# EAGLE board Arch GPRS (EAGLE 6.4), part 1 of 2
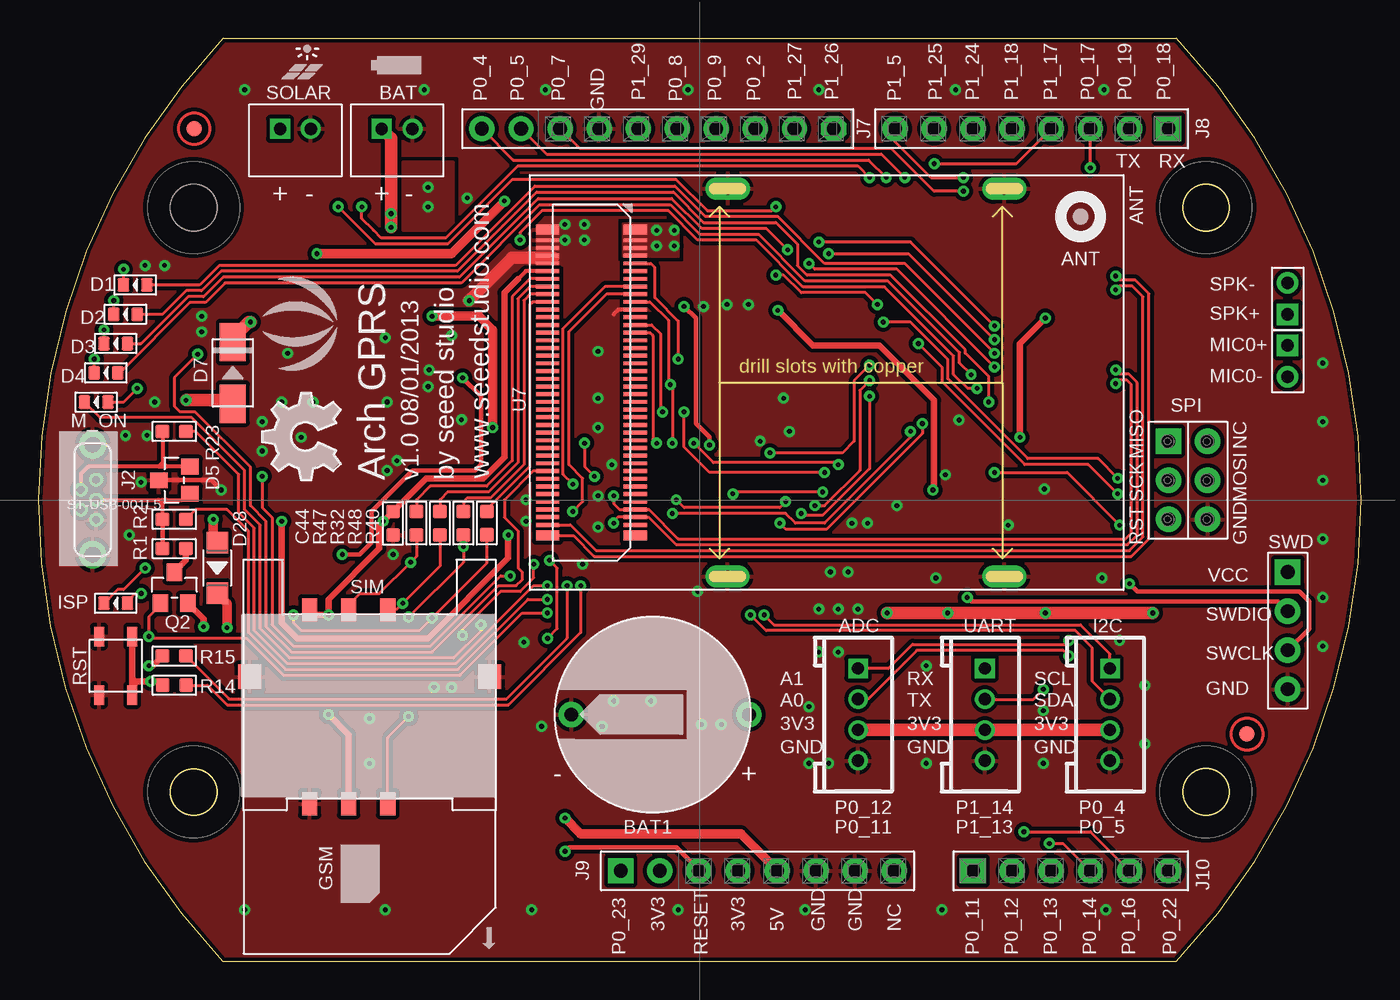
[diagram p0: board, top side]
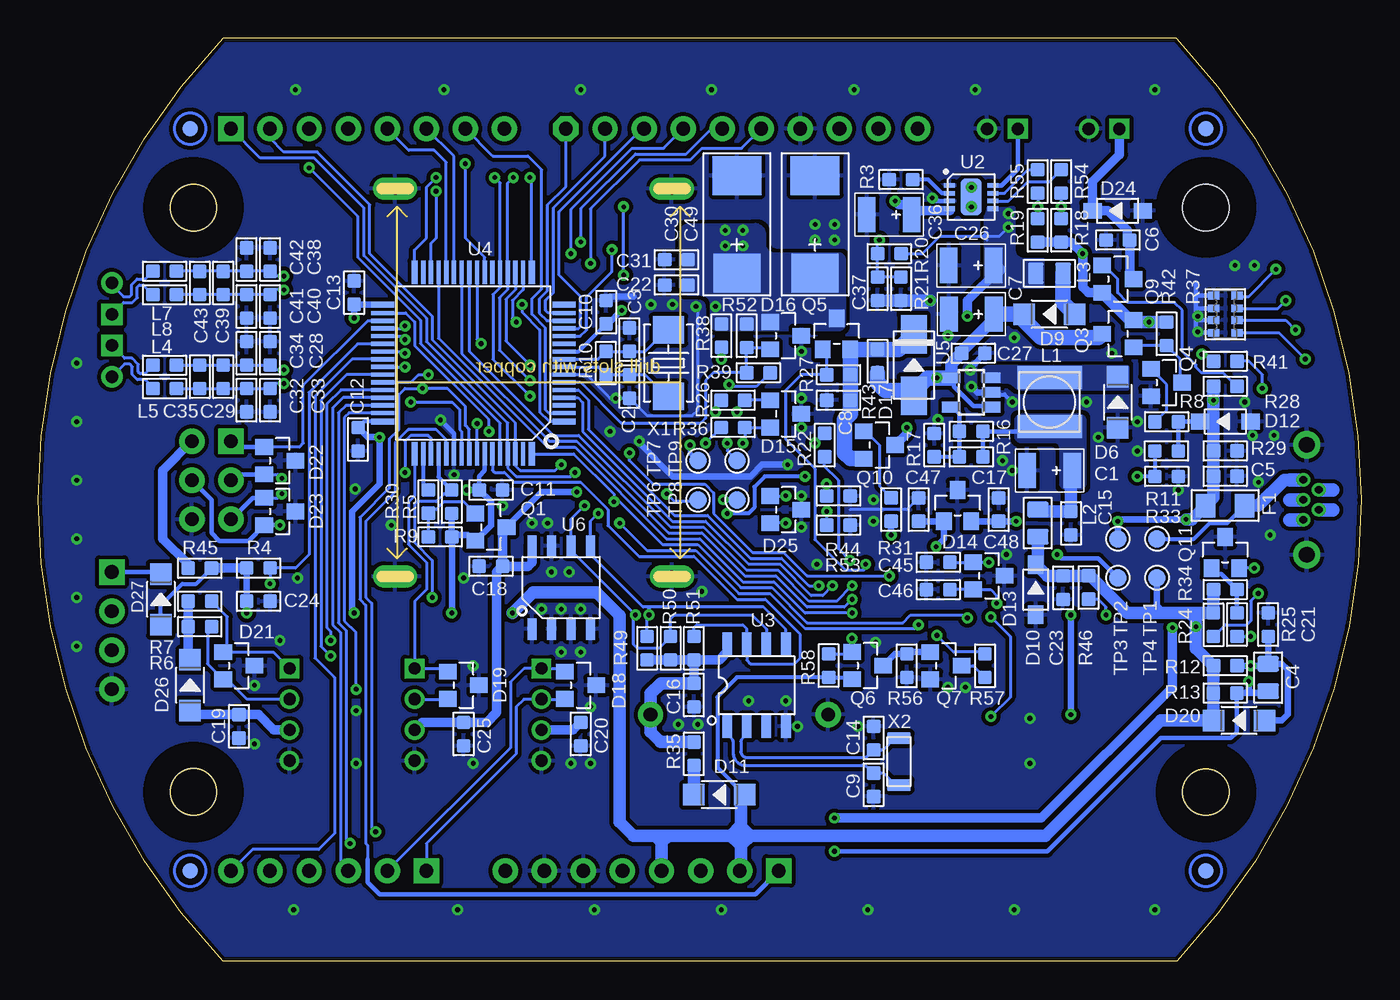
[diagram p1: board, bottom side, seen from below]

Size 86 x 60 mm. Coordinates in mm from the lower left corner, seen from the top.
Outline: 12.01,60 74,60 arc-87 74,0 11.99,0
Outline: 12.01,60 arc87 11.99,0
Outline: circle at 75.91,49 radius 1.5
Outline: circle at 75.91,11 radius 1.5
Outline: circle at 10.09,11 radius 1.5
Copper layers (1*16): Top 0.035mm / dielectric 1.5mm / Bottom 0.035mm
Design rules "default *": minimum track width 6mil, minimum drill 12mil, track to track 6mil, track to pad 6mil, pad to pad 6mil, via to via 6mil, smd to smd 0mil, copper to edge 10mil, drill to drill 8mil, minimum pad ring 6mil, minimum via ring 8mil, stop-mask expansion 4mil, vias tented up to drill 100mil, thermal gap 10mil
Net classes: 0 default: clearance 0.152 mm
Holes 3 mm at 10.09,49 75.91,49 75.91,11 10.09,11
tRestrict: area 72.9,46 to 78.9,52; area 72.9,8 to 78.9,14; area 7.1,8 to 13.1,14; area 7.1,46 to 13.1,52; area 32.8,29.6 to 33.3,29.7; area 32.8,29.1 to 33.3,29.2; area 32.8,28.6 to 33.3,28.7; area 32.8,28.1 to 33.3,28.2
bRestrict: area 7.1,46 to 13.1,52; area 72.9,46 to 78.9,52; area 7.1,8 to 13.1,14; area 72.9,8 to 78.9,14; area 9.3,42.8 to 9.8,43; area 9.3,41.9 to 9.8,42.1; area 9.3,41.2 to 9.8,41.3; area 53.3,21.4 to 53.4,21.9; area 51.9,21.4 to 52,21.9; area 50.6,21.2 to 50.7,21.7

## Footprints (pad centres in the part's own frame; a part is rotated, then mirrored left to right if it is on the bottom)
4P-2.0 = drill 0.8 pad 1.27 square: 1 -3,0 | drill 0.8 pad 1.27: 2 -1,0; 3 1,0; 4 3,0
JST-2.0 = drill 0.8 pad 1.3 square: 1 -1,0.75 | drill 0.8 pad 1.3: 2 1,0.75
2P-D12.55X2.22H = drill 0.889 pad 1.651: + -6.25,0; - 5.3,0
AVX-B = smd 1.143 x 2.286: + -1.46,0; - 1.46,0
C0603 = smd 0.889 x 0.889: 1 -0.762,0; 2 0.762,0
C0805 = smd 1.016 x 1.397: 1 -0.889,0; 2 0.889,0
AVX-D = smd 2.54 x 3.048: + -3.175,0 | smd 2.54 x 3.175: - 3.175,0
LED-0603 = smd 0.762 x 0.889: + -0.762,0; - 0.762,0
SOT23 = smd 1.016 x 1.143: 1 -0.889,-1.016; 2 0.889,-1.016; 3 0,1.016
SOD123 = smd 1.397 x 1.397: + -1.651,0; - 1.651,0
SMA = smd 2.5 x 1.7: 1 2,0; 2 -2,0
SOD123-2.7X1.6 = smd 1.2 x 1.02: 1 -1.635,0; 2 1.635,0
F1206 = smd 1.27 x 1.524: 1 -1.27,0; 2 1.27,0
MICRO-5P-180D = drill 0.508 pad 0.889: 1 0,1.3; 2 -1,0.65; 3 0,0; 4 -1,-0.65; 5 0,-1.3 | drill 1.016 pad 1.778: P1 -0.22,3.575; P2 -0.22,-3.575
10P-2.54 = drill 0.889 pad 1.651 octagon: 1 0,11.43 | drill 0.889 pad 1.651: 2 0,8.89; 3 0,6.35; 4 0,3.81; 5 0,1.27; 6 0,-1.27; 7 0,-3.81; 8 0,-6.35; 9 0,-8.89; 10 0,-11.43
8P-2.54 = drill 0.889 pad 1.651 square: 1 0,8.89 | drill 0.889 pad 1.651: 2 0,6.35; 3 0,3.81; 4 0,1.27; 5 0,-1.27; 6 0,-3.81; 7 0,-6.35; 8 0,-8.89
6P-2.54-65/35MIL = drill 0.889 pad 1.651 square: 1 0,6.35 | drill 0.889 pad 1.651: 2 0,3.81; 3 0,1.27; 4 0,-1.27; 5 0,-3.81; 6 0,-6.35
L0420 = smd 1.5 x 4.2: 1 -1.6,0; 2 1.6,0
L0805 = smd 1.016 x 1.397: 1 -0.889,0; 2 0.889,0
L0603 = smd 0.889 x 0.889: 1 -0.762,0; 2 0.762,0
2P-2.0 = drill 0.813 pad 1.397 square: 1 -1.016,0 | drill 0.813 pad 1.397: 2 1.016,0
ROUND-MARK-1.0 = smd 1.016 x 1.016: P$1 0,0
R0603 = smd 0.889 x 0.889: 1 -0.762,0; 2 0.762,0
1206-8-3.3X2.4 = smd 0.508 x 0.762: 1 -1.206,-0.762; 2 -0.381,-0.762; 3 0.381,-0.762; 4 1.206,-0.762; 5 1.206,0.762; 6 0.381,0.762; 7 -0.381,0.762; 8 -1.206,0.762
4P-SMD-3.4X3.4X1.3H = smd 1.27 x 0.635: A0 -1.905,1.079; A1 1.905,1.079; B0 -1.905,-1.079; B1 1.905,-1.079
6P-1.8 = smd 1.5 x 1: 1 -6.3,-3.9; 2 -6.3,-1.36; 3 -6.3,1.18; 4 6.3,1.18; 5 6.3,-1.36; 6 6.3,-3.9 | smd 1.6 x 1.5: P1 -1.95,-7.8; P2 -1.95,7.8
2X3P-2.54 = drill 0.889 pad 1.651 square: 1 -1.27,2.54 | drill 0.889 pad 1.651: 2 -1.27,0; 3 -1.27,-2.54; 4 1.27,-2.54; 5 1.27,0; 6 1.27,2.54
4P-65/35MIL = drill 0.889 pad 1.651 square: 1 0,3.81 | drill 0.889 pad 1.651: 2 0,1.27; 3 0,-1.27; 4 0,-3.81
TP_4545 = smd 1.143 x 1.143: T 0,0
DFN8 = smd 0.3 x 0.727: 1 -0.75,-1.413; 2 -0.25,-1.413; 3 0.25,-1.413; 4 0.75,-1.413; 5 0.75,1.413; 6 0.25,1.413; 7 -0.25,1.413; 8 -0.75,1.413 | smd 2.413 x 1.397: HEAT 0,0
SOP8 = smd 0.635 x 1.524: 1 -1.905,-2.667; 2 -0.635,-2.667; 3 0.635,-2.667; 4 1.905,-2.667; 5 1.905,2.667; 6 0.635,2.667; 7 -0.635,2.667; 8 -1.905,2.667
LQFP64 = smd 1.5 x 0.4: 1 -5.9,3.81; 16 -5.9,-3.81; 33 5.9,-3.81; 48 5.9,3.81 | smd 1.5 x 0.28: 2 -5.9,3.25; 3 -5.9,2.75; 4 -5.9,2.25; 5 -5.9,1.75; 6 -5.9,1.25; 7 -5.9,0.75; 8 -5.9,0.25; 9 -5.9,-0.25; 10 -5.9,-0.75; 11 -5.9,-1.25; 12 -5.9,-1.75; 13 -5.9,-2.25; 14 -5.9,-2.75; 15 -5.9,-3.25; 34 5.9,-3.25; 35 5.9,-2.75; 36 5.9,-2.25; 37 5.9,-1.75; 38 5.9,-1.25; 39 5.9,-0.75; 40 5.9,-0.25; 41 5.9,0.25; 42 5.9,0.75; 43 5.9,1.25; 44 5.9,1.75; 45 5.9,2.25; 46 5.9,2.75; 47 5.9,3.25 | smd 0.4 x 1.5: 17 -3.81,-5.9; 32 3.81,-5.9; 49 3.81,5.9; 64 -3.81,5.9 | smd 0.28 x 1.5: 18 -3.25,-5.9; 19 -2.75,-5.9; 20 -2.25,-5.9; 21 -1.75,-5.9; 22 -1.25,-5.9; 23 -0.75,-5.9; 24 -0.25,-5.9; 25 0.25,-5.9; 26 0.75,-5.9; 27 1.25,-5.9; 28 1.75,-5.9; 29 2.25,-5.9; 30 2.75,-5.9; 31 3.25,-5.9; 50 3.25,5.9; 51 2.75,5.9; 52 2.25,5.9; 53 1.75,5.9; 54 1.25,5.9; 55 0.75,5.9; 56 0.25,5.9; 57 -0.25,5.9; 58 -0.75,5.9; 59 -1.25,5.9; 60 -1.75,5.9; 61 -2.25,5.9; 62 -2.75,5.9; 63 -3.25,5.9
SOT23-5 = smd 0.69 x 1.2: 1 -0.95,-1.3; 2 0,-1.3; 3 0.95,-1.3; 4 0.95,1.3; 5 -0.95,1.3
SOIC8-6.0 = smd 0.6 x 1.4: 1 -1.905,-2.7; 2 -0.635,-2.7; 3 0.635,-2.7; 4 1.905,-2.7; 5 1.905,2.7; 6 0.635,2.7; 7 -0.635,2.7; 8 -1.905,2.7
80P-0.5-3H = smd 1.5 x 0.65: 1 -12.45,9.95; 40 -12.45,-9.95; 41 -18.15,-9.95; 80 -18.15,9.95 | smd 1.5 x 0.25: 2 -12.45,9.25; 3 -12.45,8.75; 4 -12.45,8.25; 5 -12.45,7.75; 6 -12.45,7.25; 7 -12.45,6.75; 8 -12.45,6.25; 9 -12.45,5.75; 10 -12.45,5.25; 11 -12.45,4.75; 12 -12.45,4.25; 13 -12.45,3.75; 14 -12.45,3.25; 15 -12.45,2.75; 16 -12.45,2.25; 17 -12.45,1.75; 18 -12.45,1.25; 19 -12.45,0.75; 20 -12.45,0.25; 21 -12.45,-0.25; 22 -12.45,-0.75; 23 -12.45,-1.25; 24 -12.45,-1.75; 25 -12.45,-2.25; 26 -12.45,-2.75; 27 -12.45,-3.25; 28 -12.45,-3.75; 29 -12.45,-4.25; 30 -12.45,-4.75; 31 -12.45,-5.25; 32 -12.45,-5.75; 33 -12.45,-6.25; 34 -12.45,-6.75; 35 -12.45,-7.25; 36 -12.45,-7.75; 37 -12.45,-8.25; 38 -12.45,-8.75; 39 -12.45,-9.25; 42 -18.15,-9.25; 43 -18.15,-8.75; 44 -18.15,-8.25; 45 -18.15,-7.75; 46 -18.15,-7.25; 47 -18.15,-6.75; 48 -18.15,-6.25; 49 -18.15,-5.75; 50 -18.15,-5.25; 51 -18.15,-4.75; 52 -18.15,-4.25; 53 -18.15,-3.75; 54 -18.15,-3.25; 55 -18.15,-2.75; 56 -18.15,-2.25; 57 -18.15,-1.75; 58 -18.15,-1.25; 59 -18.15,-0.75; 60 -18.15,-0.25; 61 -18.15,0.25; 62 -18.15,0.75; 63 -18.15,1.25; 64 -18.15,1.75; 65 -18.15,2.25; 66 -18.15,2.75; 67 -18.15,3.25; 68 -18.15,3.75; 69 -18.15,4.25; 70 -18.15,4.75; 71 -18.15,5.25; 72 -18.15,5.75; 73 -18.15,6.25; 74 -18.15,6.75; 75 -18.15,7.25; 76 -18.15,7.75; 77 -18.15,8.25; 78 -18.15,8.75; 79 -18.15,9.25 | drill 0.7 pad 1.45 long: P1 11.55,-12.6 | drill 0.75 pad 1.45 long: P2 -6.45,-12.6; P3 -6.43,12.6; P4 11.55,12.6
2P-SMD-5X3.2 = smd 1.778 x 2.032: 1 -2.159,0; 2 2.159,0
2P-SMD-3.2X1.5 = smd 0.762 x 1.524: 1 -1.524,0; 2 1.524,0

## Placement (x,y rotation side)
ADC  DIP Grove  [4P-2.0]  53.29,16.03 270 top
BAT  DIP JST  [JST-2.0]  23.32,53.37 0 top
BAT1  CR1220(LC)  [2P-D12.55X2.22H]  39.95,16.03 180 top
C1  10V100uF  [AVX-B]  20.26,31.91 180 bottom
C2  12pF  [C0603]  47.57,37.37 90 bottom
C3  12pF  [C0603]  47.57,40.42 270 bottom
C4  10uF  [C0805]  6.04,18.44 90 bottom
C5  100nF  [C0603]  8.83,31.53 180 bottom
C6  100nF  [C0603]  15.81,46.89 0 bottom
C7  10V100uF  [AVX-B]  25.34,42.07 180 bottom
C8  100nF  [C0603]  33.98,36.47 0 bottom
C9  DNP  [C0603]  31.69,11.46 90 bottom
C10  100nF  [C0603]  49.09,42.2 270 bottom
C11  100nF  [C0603]  56.58,30.64 180 bottom
C12  100nF  [C0603]  65.22,33.93 90 bottom
C13  100nF  [C0603]  65.47,43.47 270 bottom
C14  DNP  [C0603]  31.69,14.5 270 bottom
C15  100nF  [C0603]  18.87,28.47 90 bottom
C16  100nF  [C0603]  43.38,17.3 270 bottom
C17  39pF  [C0603]  25.35,32.8 0 bottom
C18  100nF  [C0603]  56.58,25.68 0 bottom
C19  100nF  [C0603]  72.96,15.27 90 bottom
C20  100nF  [C0603]  50.74,14.76 90 bottom
C21  100nF  [C0603]  6.04,21.88 270 bottom
C22  100nF  [C0603]  44.52,43.97 0 bottom
C23  39pF  [C0603]  19.37,24.28 90 bottom
C24  100nF  [C0603]  71.7,23.4 180 bottom
C25  100nF  [C0603]  58.36,14.76 90 bottom
C26  10V100uF  [AVX-B]  25.35,45.24 180 bottom
C27  100nF  [C0603]  25.22,39.53 180 bottom
C28  DNP  [C0603]  70.94,39.53 270 bottom
C29  DNP  [C0603]  73.99,38 270 bottom
C30  470uF 6.3V  [AVX-D]  40.58,47.91 90 bottom
C31  39pF  [C0603]  44.52,45.62 0 bottom
C32  DNP  [C0603]  72.46,36.48 270 bottom
C33  DNP  [C0603]  70.94,36.48 270 bottom
C34  DNP  [C0603]  72.46,39.53 270 bottom
C35  DNP  [C0603]  75.51,38 270 bottom
C36  10V100uF  [AVX-B]  30.68,48.54 180 bottom
C37  100nF  [C0603]  31.44,43.72 90 bottom
C38  DNP  [C0603]  70.94,45.62 270 bottom
C39  DNP  [C0603]  73.99,44.1 270 bottom
C40  DNP  [C0603]  70.94,42.57 270 bottom
C41  DNP  [C0603]  72.46,42.57 270 bottom
C42  DNP  [C0603]  72.46,45.62 270 bottom
C43  DNP  [C0603]  75.51,44.1 270 bottom
C44  39pF  [C0603]  23.06,28.47 90 top
C45  39pF  [C0603]  27.5,25.94 0 bottom
C46  39pF  [C0603]  27.5,24.16 0 bottom
C47  39pF  [C0603]  28.77,29.36 270 bottom
C48  39pF  [C0603]  23.56,29.36 270 bottom
C49  470uF 6.3V  [AVX-D]  35.5,47.91 90 bottom
D1  Blue  [LED-0603]  6.29,43.97 180 top
D2  Blue  [LED-0603]  5.66,42.07 180 top
D3  DNP  [LED-0603]  5.02,40.16 180 top
D4  DNP  [LED-0603]  4.39,38.26 180 top
D5  CESD3V3AP  [SOT23]  8.84,31.27 90 top
D6  B5819W  [SOD123]  15.82,36.35 90 bottom
D7  1N5819  [SMA]  12.64,38.26 90 top
D9  B5819W  [SOD123]  20.26,42.07 180 bottom
D10  CESD5V0D1  [SOD123-2.7X1.6]  21.15,24.15 90 bottom
D11  B5819W  [SOD123]  41.73,10.82 180 bottom
D12  CESD5V0D1  [SOD123-2.7X1.6]  8.83,35.09 180 bottom
D13  CESD3V3AP  [SOT23]  24.2,25.05 270 bottom
D14  CESD3V3AP  [SOT23]  26.24,29.62 0 bottom
D15  CESD3V3AP  [SOT23]  37.41,35.58 270 bottom
D16  CESD3V3AP  [SOT23]  37.41,40.67 270 bottom
D17  1N5819  [SMA]  29.08,38.76 90 bottom
D18  CESD3V3AP  [SOT23]  50.75,17.94 270 bottom
D19  CESD3V3AP  [SOT23]  58.37,17.94 270 bottom
D20  B5819W  [SOD123]  7.94,15.65 180 bottom
D21  CESD3V3AP  [SOT23]  72.97,19.21 270 bottom
D22  CESD3V3AP  [SOT23]  70.31,32.54 270 bottom
D23  CESD3V3AP  [SOT23]  70.31,29.24 270 bottom
D24  CESD5V0D1  [SOD123-2.7X1.6]  15.82,48.8 180 bottom
D25  CESD3V3AP  [SOT23]  37.41,29.36 270 bottom
D26  B5819W  [SOD123]  76.14,17.94 90 bottom
D27  B5819W  [SOD123]  78.04,23.52 90 bottom
D28  B5819W  [SOD123]  11.63,25.56 270 top
F1  PPTC_1000mA  [F1206]  8.83,29.63 180 bottom
I2C  DIP Grove  [4P-2.0]  69.67,16.03 270 top
ISP  Blue  [LED-0603]  5.02,23.27 180 top
J2  ST-USB-001L5  [MICRO-5P-180D]  3.75,30 0 top
J7  1X10P-2.54-8.5  [10P-2.54]  40.27,54.13 270 top
J8  1X8P-2.54-8.5  [8P-2.54]  64.59,54.13 270 top
J9  1X8P-2.54-8.5  [8P-2.54]  46.76,5.87 90 top
J10  1X6P-2.54-8.5  [6P-2.54-65/35MIL]  67.13,5.87 90 top
L1  4.7uH  [L0420]  20.26,36.36 270 bottom
L2  470R/2A  [L0805]  21.02,28.48 270 bottom
L3  470R/2A  [L0805]  20.26,44.73 0 bottom
L4  DNP  [L0603]  77.79,38.76 0 bottom
L5  DNP  [L0603]  77.79,37.23 0 bottom
L7  DNP  [L0603]  77.79,44.87 180 bottom
L8  DNP  [L0603]  77.79,43.34 180 bottom
M_ON  Blue  [LED-0603]  3.75,36.35 180 top
MIC  DNP  [2P-2.0]  81.23,39.02 270 top
P1  [ROUND-MARK-1.0]  10.13,54.13 0 top
P2  [ROUND-MARK-1.0]  78.58,14.76 0 top
P3  [ROUND-MARK-1.0]  10.1,5.87 0 bottom
P4  [ROUND-MARK-1.0]  76.14,5.87 0 bottom
P5  [ROUND-MARK-1.0]  10.1,54.13 0 bottom
P6  [ROUND-MARK-1.0]  76.14,54.13 0 bottom
Q1  CJ2305  [SOT23]  56.58,28.22 270 bottom
Q2  CJ2305  [SOT23]  8.83,24.28 0 top
Q3  CJ2305  [SOT23]  15.81,40.8 90 bottom
Q4  2N7002  [SOT23]  12.65,37.62 270 bottom
Q5  CJ2305  [SOT23]  34.11,40.79 0 bottom
Q6  CJ2305  [SOT23]  32.08,19.22 270 bottom
Q7  2N7002  [SOT23]  26.99,19.21 270 bottom
Q9  CJ2305  [SOT23]  15.81,44.35 270 bottom
Q10  CJ2305  [SOT23]  31.32,33.56 270 bottom
Q11  CJ2305  [SOT23]  8.83,26.57 0 bottom
R1  1k  [R0603]  8.83,26.83 0 top
R2  22R  [R0603]  8.83,28.73 0 top
R3  3.9k  [R0603]  29.91,50.82 0 bottom
R4  100k  [R0603]  71.7,25.56 0 bottom
R5  100k  [R0603]  59.13,29.87 90 bottom
R6  10k  [R0603]  75.5,21.75 0 bottom
R7  10k  [R0603]  75.5,23.4 0 bottom
R8  100R  [R0603]  12.64,35.08 0 bottom
R9  100k  [R0603]  59.88,27.59 0 bottom
R10  DNP  [R0603]  49.1,38.89 270 bottom
R11  1k  [R0603]  12.65,33.18 180 bottom
R12  10M  [R0603]  8.83,19.21 0 bottom
R13  1k  [R0603]  8.84,17.43 0 bottom
R14  1k  [R0603]  8.84,17.94 0 top
R15  1k  [R0603]  8.83,19.84 0 top
R16  68k_1%  [R0603]  25.35,34.45 0 bottom
R17  15k_1%  [R0603]  27.76,33.55 90 bottom
R18  100k  [R0603]  19.5,47.52 270 bottom
R19  100k  [R0603]  21.02,47.52 270 bottom
R20  1M_1%  [R0603]  30.67,46 0 bottom
R21  1M_1%  [R0603]  29.91,43.72 90 bottom
R22  100R  [R0603]  34.88,33.56 90 bottom
R23  22R  [R0603]  8.83,34.44 0 top
R24  1k  [R0603]  9.6,21.87 270 bottom
R25  1k  [R0603]  8.07,21.88 90 bottom
R26  100R  [R0603]  40.84,36.47 180 bottom
R27  100k  [R0603]  33.98,38.13 180 bottom
R28  100R  [R0603]  8.83,37.37 180 bottom
R29  1M_1%  [R0603]  8.83,33.18 180 bottom
R30  100R  [R0603]  60.65,29.88 90 bottom
R31  100R  [R0603]  30.55,29.37 270 bottom
R32  22R  [R0603]  26.1,28.48 90 top
R33  100k  [R0603]  12.64,31.52 0 bottom
R34  100k  [R0603]  8.83,24.16 0 bottom
R35  1k  [R0603]  43.38,13.49 90 bottom
R36  100R  [R0603]  40.84,34.71 180 bottom
R37  1k  [1206-8-3.3X2.4]  8.83,42.07 270 bottom
R38  0R  [R0603]  41.59,40.67 90 bottom
R39  100R  [R0603]  39.19,38.26 180 bottom
R40  100R  [R0603]  29.15,28.48 90 top
R41  1k  [R0603]  8.83,39.01 180 bottom
R42  1M_1%  [R0603]  12.65,40.8 270 bottom
R43  DNP  [R0603]  31.44,39.02 270 bottom
R44  DNP  [R0603]  33.98,30.25 0 bottom
R45  DNP  [R0603]  75.51,25.55 0 bottom
R46  100k  [R0603]  17.72,24.29 90 bottom
R47  22R  [R0603]  24.58,28.48 90 top
R48  22R  [R0603]  27.63,28.48 90 top
R49  10k  [R0603]  46.42,20.34 270 bottom
R50  10k  [R0603]  44.9,20.34 270 bottom
R51  10k  [R0603]  43.38,20.34 270 bottom
R52  100k  [R0603]  39.95,40.66 270 bottom
R53  DNP  [R0603]  33.98,28.35 0 bottom
R54  1k  [R0603]  19.5,50.7 90 bottom
R55  1k  [R0603]  21.02,50.7 90 bottom
R56  100k  [R0603]  29.53,19.21 90 bottom
R57  22R  [R0603]  24.45,19.21 90 bottom
R58  100k  [R0603]  34.62,19.22 270 bottom
RST  TS-1182  [4P-SMD-3.4X3.4X1.3H]  5.02,19.21 270 top
SIM  ST-SIM-004B  [6P-1.8]  21.53,16.54 270 top
SOLAR  DIP JST  [JST-2.0]  16.71,53.37 0 top
SPI  2X3P-2.54-2.54-11.6/3.0  [2X3P-2.54]  74.75,31.27 0 top
SPK  DNP  [2P-2.0]  81.23,43.08 90 top
SWD  DNP  [4P-65/35MIL]  81.23,21.49 0 top
TP1  [TP_4545]  13.27,27.46 270 bottom
TP2  [TP_4545]  15.81,27.46 270 bottom
TP3  [TP_4545]  15.81,24.92 270 bottom
TP4  [TP_4545]  13.27,24.92 270 bottom
TP6  [TP_4545]  43.12,30 270 bottom
TP7  [TP_4545]  43.12,32.54 270 bottom
TP8  [TP_4545]  40.58,30 270 bottom
TP9  [TP_4545]  40.58,32.54 270 bottom
U2  CN3065  [DFN8]  25.35,49.69 270 bottom
U3  DS1337S  [SOP8]  39.31,17.94 0 bottom
U4  LPC11U24FBD64/401  [LQFP64]  57.73,38.89 180 bottom
U5  TD6810-ADJ  [SOT23-5]  25.34,36.98 90 bottom
U6  AT24C256C-SSHL-T  [SOIC8-6.0]  52.01,24.29 0 bottom
U7  AXK580147YG  [80P-0.5-3H]  51.26,37.62 0 top
U$55  [LOGO_SILK]  17.73,41.43 90 top
U$56  [OSHW_FILLX200_NOTEXT]  19.64,31.27 90 top
UART  DIP Grove  [4P-2.0]  61.54,16.03 270 top
X1  12MHz  [2P-SMD-5X3.2]  45.03,38.89 270 bottom
X2  050037001 ABS07-32.768KHZ-7-T  [2P-SMD-3.2X1.5]  30.04,12.98 270 bottom

## Library data of the parts
ADC I2C UART = Connector
BAT J7-J10 MIC SOLAR SPI SPK SWD = Connector 
BAT1 J2 L1 SIM U4-U7 = template
C1-C17 C19-C49 D1-D7 D9-D28 F1 ISP L2-L5 L7 L8 M_ON Q1-Q7 Q9-Q11 R1-R58 RST X1 X2 = Discrete
C18 = Discrete (1)
P1-P6 TP1-TP4 TP6-TP9 = Discrete; PARTNO: DNP
U2 = IC
U3 = For_Test_Albert
U$55 U$56 = Logo

## Nets
EG10_2V8: R41.2 U7.49
EG10_MIC0+: C28.2 C29.1 C34.2 C35.1 D25.2 L4.2 U7.38
EG10_MIC0+1: C39.2 C40.1 C41.1 C43.2 L8.1 U7.42
EG10_MIC0-: C29.2 C32.1 C33.1 C35.2 D25.1 L5.2 U7.37
EG10_RST: R40.2 U7.71
EG10_RX: D15.2 R36.1 U7.14
EG10_SIM_CLK: C46.2 D13.2 R32.1 SIM.3
EG10_SIM_IO: C47.2 D14.1 R48.1 SIM.4
EG10_SIM_RST: C45.2 D13.1 R47.1 SIM.2
EG10_SIM_VCC: C44.2 C48.2 D14.2 SIM.1 SIM.5 U7.75
EG10_SPK-: C38.2 C39.1 C42.2 C43.1 L7.1 U7.41
EG10_TX: D15.1 R26.1 U7.13
GND: ADC.4 BAT1.- BAT.2 C1.- C2.1 C3.1 C5.1 C6.1 C7.- C8.1 C9.1 C10.1 C11.1 C12.1 C13.1 C14.1 C15.1 C16.2 C18.1 C19.1 C20.1 C21.1 C22.1 C23.1 C24.1 C25.1 C26.- C27.1 C28.1 C30.- C31.1 C32.2 C33.2 C34.1 C36.- C37.1 C38.1 C40.2 C41.2 C42.1 C44.1 C45.1 C46.1 C47.1 C48.1 C49.- D5.3 D6.+ D10.1 D12.1 D13.3 D14.3 D15.3 D16.3 D18.3 D19.3 D21.3 D22.3 D23.3 D24.1 D25.3 I2C.4 J2.5 J2.P1 J2.P2 J7.7 J9.6 J9.7 Q4.2 Q7.2 Q11.3 R3.1 R17.2 R21.1 R29.1 R33.2 R37.1 R37.2 R37.3 R37.4 R44.2 R53.2 R56.1 RST.B0 RST.B1 SIM.6 SIM.P1 SIM.P2 SOLAR.2 SPI.4 SWD.4 U2.1 U2.3 U3.4 U4.7 U4.54 U5.2 U6.1 U6.2 U6.3 U6.4 U6.7 U7.11 U7.76 U7.77 U7.78 U7.79 U7.80 U7.P1 U7.P2 U7.P3 U7.P4 UART.4
HEAT: U2.HEAT
N$1: D27.- SWD.1
N$2: D4.- R37.5
N$3: Q2.3 R1.2
N$4: Q5.1 R27.2 R57.2
N$5: R3.2 U2.2
N$6: D11.- R35.1
N$7: C4.2 C21.2 D20.+ R12.2 R15.1
N$8: Q3.1 Q4.3 R42.2
N$9: C8.2 D17.1 Q5.2 Q10.2 R27.1 R43.1
N$10: D9.+ L3.2
N$11: R48.2 U7.72
N$12: Q1.1 R9.1 R30.1
N$13: C14.2 U3.2 X2.1
N$14: C9.2 U3.1 X2.2
N$15: Q11.1 R25.2 R34.2
N$16: ISP.- Q11.2
N$17: D3.- R37.6
N$18: ISP.+ R24.2
N$19: D2.- R37.7
N$20: R47.2 U7.74
N$21: R38.1 U7.5
N$22: M_ON.+ R41.1
N$23: R45.1 SPI.6
N$24: BAT1.+ C16.1 R35.2 R49.2 R50.2 R51.2 U3.8
N$25: R32.2 U7.73
N$26: R39.1 TP9.T U7.10
N$27: Q10.1 R31.1
N$28: L5.1 MIC.2
N$29: D6.- L1.1 U5.3
N$30: D1.- R37.8
N$31: L4.1 MIC.1
N$32: L7.2 SPK.2
N$33: Q9.1 R28.1
N$34: L8.2 SPK.1
N$35: D5.2 J2.2 R23.1
N$36: D5.1 J2.3 R1.1 R2.1
N$37: C36.+ D7.1 Q3.2 Q9.2 R18.2 R19.2 R42.1 U2.4
N$38: F1.1 J2.1 TP1.T
N$39: C17.1 R16.1 R17.1 U5.5
N$40: Q4.1 R8.1
N$41: R44.1 U7.8
N$42: R53.1 U7.9
N$43: R55.2 U2.7
N$44: R54.2 U2.6
N$45: Q7.3 R57.1
N$46: Q6.3 Q7.1 R56.2
N$47: C1.+ C15.2 C17.2 L1.2 L2.1 R16.2
N$48: Q6.1 R22.1 R58.1
PIO0_0/RES: R15.2 U4.4
PIO0_1: R14.2 U4.5
PIO0_2: J7.3 U4.13
PIO0_3: R11.2 R33.1 U4.19
PIO0_4: D21.1 I2C.1 J7.10 R7.2 R50.1 U3.6 U4.20 U6.6
PIO0_5: D21.2 I2C.2 J7.9 R6.2 R49.1 U3.5 U4.21 U6.5
PIO0_6: Q2.1 R25.1 U4.29
PIO0_7: J7.8 U4.30
PIO0_8: J7.5 U4.36
PIO0_9: J7.4 U4.37
PIO0_10: R4.2 SWD.3 U4.38
PIO0_11: ADC.2 D18.2 J10.1 U4.42
PIO0_12: ADC.1 D18.1 J10.2 U4.44
PIO0_13: J10.3 U4.45
PIO0_14: J10.4 U4.46
PIO0_15: R5.2 SWD.2 U4.52
PIO0_16: J10.5 U4.53
PIO0_17: J8.3 U4.60
PIO0_18: J8.1 R26.2 U4.61
PIO0_19: J8.2 R36.2 U4.62
PIO0_20: U4.11
PIO0_21: U4.22
PIO0_22: J10.6 U4.40
PIO0_23: C37.2 J9.1 R20.1 R21.2 U4.56
PIO1_0: R18.1 R54.1 U4.1
PIO1_1: R19.1 R55.1 U4.17
PIO1_2: R22.2 U4.34
PIO1_3: R30.2 U4.50
PIO1_4: U4.16
PIO1_5: J8.8 U4.32
PIO1_6: R40.1 R46.1 TP8.T U4.64
PIO1_7: D16.2 R39.2 R52.2 U4.6
PIO1_8: D1.+ U4.39
PIO1_9: D2.+ U4.55
PIO1_10: D3.+ U4.12
PIO1_11: D4.+ U4.43
PIO1_12: R51.1 U3.7 U4.59
PIO1_13: D19.2 U4.47 UART.2
PIO1_14: D19.1 U4.49 UART.1
PIO1_15: M_ON.- U4.57
PIO1_16: U4.63
PIO1_17: J8.4 U4.23
PIO1_18: J8.5 U4.28
PIO1_19: U4.3
PIO1_20: D22.2 SPI.2 U4.18
PIO1_21: D22.1 SPI.1 U4.35
PIO1_22: D23.2 SPI.5 U4.51
PIO1_23: D23.1 SPI.3 U4.24
PIO1_24: J8.6 U4.27
PIO1_25: J8.7 U4.2
PIO1_26: J7.1 U4.14
PIO1_27: J7.2 U4.15
PIO1_28: U4.31
PIO1_29: J7.6 U4.41
RESET: C4.1 J9.3 R13.2 R14.1 RST.A0 RST.A1
USB_5V: C5.2 D7.2 D12.2 D28.+ F1.2 R8.2 R11.1 R28.2 R29.2 R31.2 TP2.T
USB_DM: R23.2 U4.25
USB_DP: R2.2 U4.26
USB_ID: J2.4
VCC_3V3: C10.2 C11.2 C12.2 C13.2 C23.2 C24.2 D10.2 D11.+ D20.- D27.+ J9.2 J9.4 L2.2 Q1.2 Q2.2 Q6.2 R4.1 R5.1 R9.2 R12.1 R13.1 R24.1 R34.1 R45.2 R46.2 R58.2 TP4.T U4.10 U4.33 U4.48 U4.58
VCC_5V: D28.- J9.5
VCC_BAT: BAT.1 C26.+ L3.1 Q10.3 R20.2 U2.5 U2.8
VCC_BUCK: C7.+ C27.2 D9.- D17.2 Q3.3 R43.2 TP3.T U5.1 U5.4
VCC_EG10: C22.2 C30.+ C31.2 C49.+ D16.1 Q5.3 R38.2 R52.1 TP7.T U7.1 U7.2 U7.3 U7.4
VCC_G: ADC.3 C18.2 C19.2 C20.2 C25.2 D26.+ I2C.3 Q1.3 TP6.T U6.8 UART.3
VCC_I2C: D26.- R6.1 R7.1
VCC_SOLAR: C6.2 D24.2 Q9.3 SOLAR.1
XTALIN: C2.2 R10.2 U4.8 X1.2
XTALOUT: C3.2 R10.1 U4.9 X1.1